# Altium PCB ArduinoUnoShield.PcbDoc
Units mm, origin at the board's own origin, x right, y up, seen from the top; angles counter-clockwise.
Board outline 68.58 x 53.34 mm, 2 copper layers (Top Layer, Bottom Layer); 17 components, 77 nets, 156 pads, 6 vias.
Unrouted connection lines stored in the file: 5.
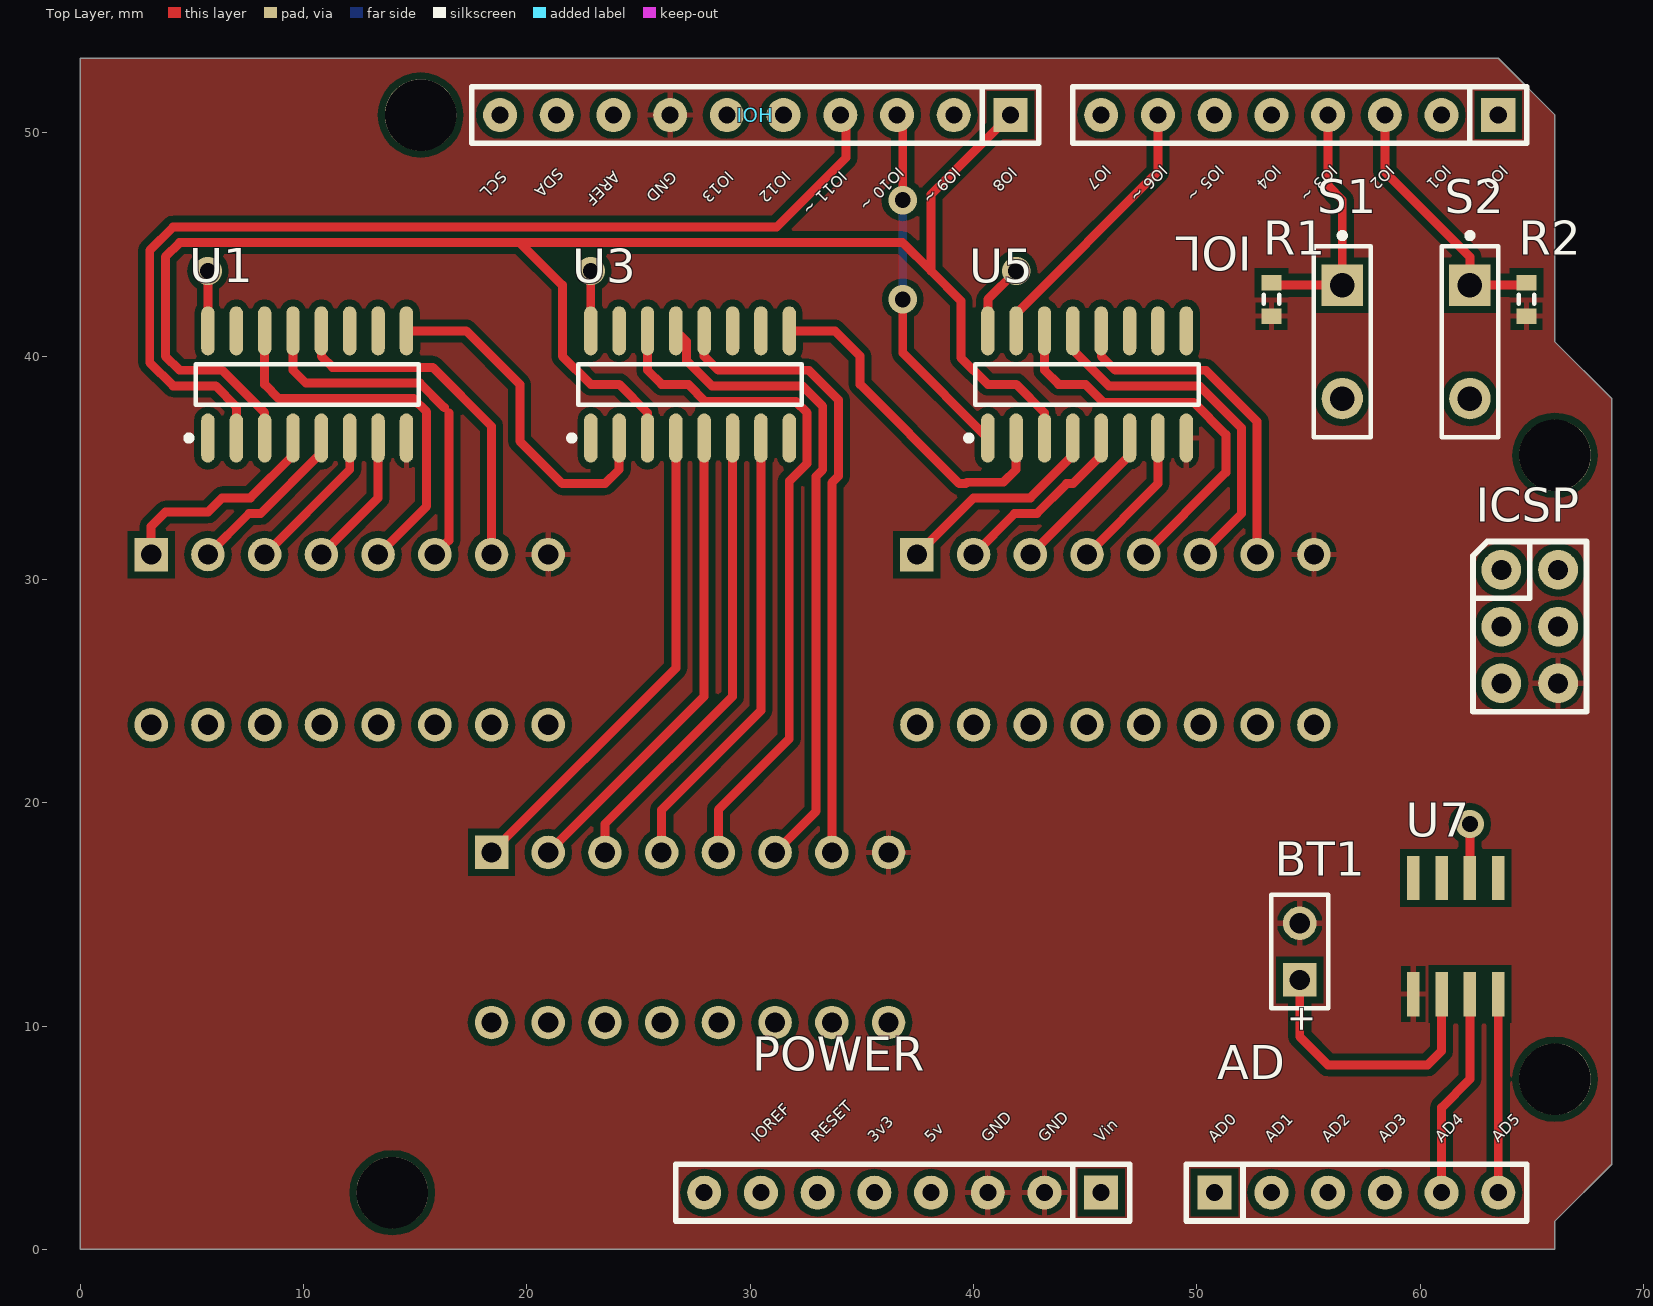
[diagram p0: Top Layer view]
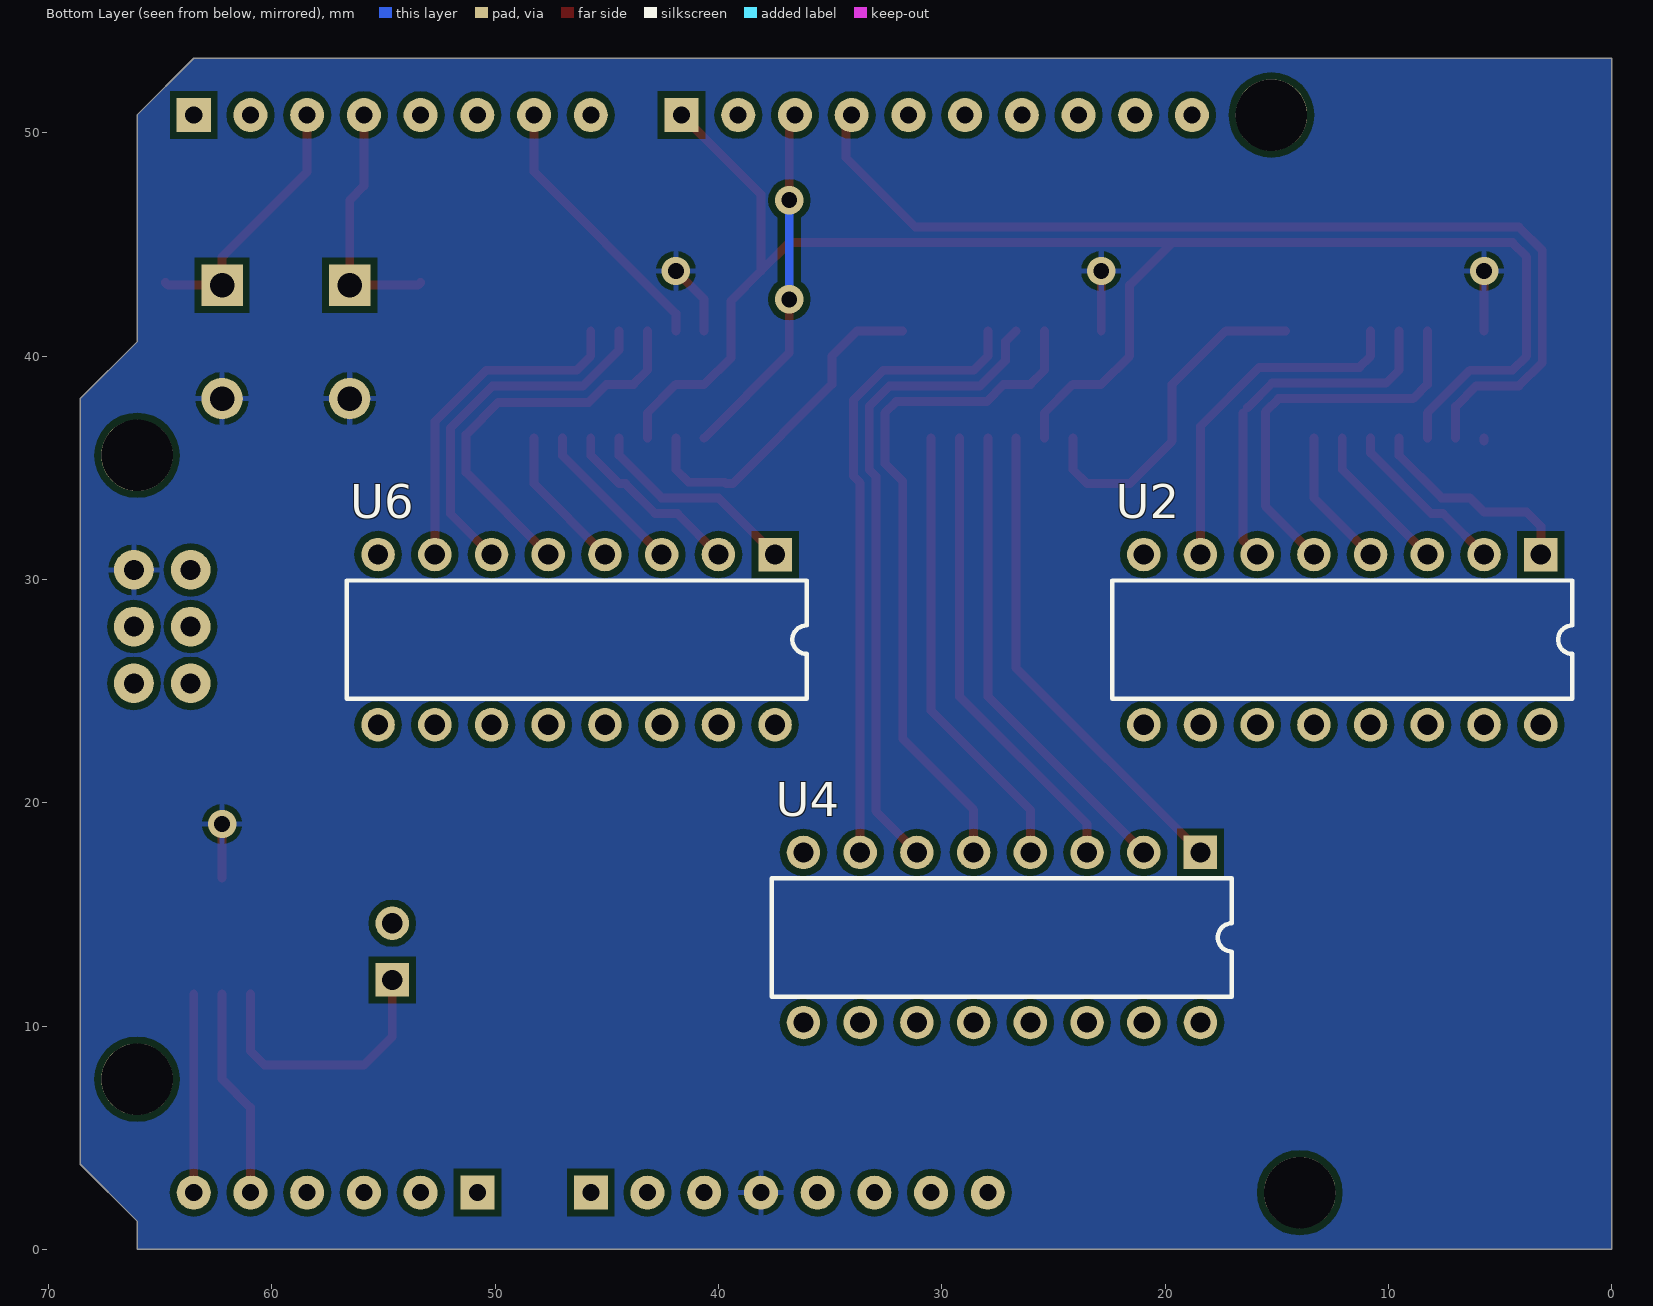
[diagram p1: Bottom Layer view, seen from below]

## Layer stack, top to bottom
Top Solder: solder mask 0.0102, Solder Resist, Dk 3.5
Top Layer: signal copper 0.0356
Dielectric1: dielectric 0.32, FR-4, Dk 4.8
Bottom Layer: signal copper 0.0356
Bottom Solder: solder mask 0.0102, Solder Resist, Dk 3.5

## Board outline
0,0 0,53.34 63.5,53.34 66.04,50.8 66.04,40.64 68.58,38.1 68.58,3.81 66.04,1.27 66.04,0

## Design rules (kind name [scope] priority, off if disabled: settings)
Clearance [All] p1: gap=0.3 ignorepadtopadclearanceinfootprint=FALSE
PolygonConnect [All] p1: connectstyle=Relief reliefconductorwidth=0.254 reliefentries=4 polygonreliefangle="90 Angle" airgapwidth=0.254
RoomDefinition Clock [InComponentClass('Clock')] p1: confinementstyle=ConfineIn formatcopy=TRUE lockcomponents=FALSE outline -29.845,58.42 20.955,58.42 20.955,83.82 -29.845,83.82
RoomDefinition ArduinoUnoShield [InComponentClass('ArduinoUnoShield')] p2: confinementstyle=ConfineOut formatcopy=TRUE lockcomponents=FALSE outline 69.723,-0.889 84.709,-0.889 84.709,10.922 69.723,10.922
RoutingVias [All] p1: holewidth=0.711 width=1.27 viastyle="Through Hole" minholewidth=0.711 minwidth=1.27 maxholewidth=0.711 maxwidth=1.27
SilkToSolderMaskClearance SilkscreenOverComponentPads [IsPad] p1: minsilkscreentomaskgap=0.254 clearancetoexposedcopper=TRUE
SolderMaskExpansion [All] p1: expansion=0.102
Width [All] p1: maxlimit=0.6 minlimit=0.2 preferedwidth=0.4
29 further rules are at their usual default settings.

## Classes and differential pairs
component class Clock: U1 U2 U3 U4 U5 U6
component class ArduinoUnoShield: AD BT1 ICSP IOH IOL POWER R1 R2 S1 S2 U7

## Components (designator, comment, footprint, x,y, rotation, side; value= is the part's Value field where it differs from the comment)
AD "AD" "Header 6x1 8.5mm" 50.8,2.54 r0 top locked
BT1 "Battery" BAT-2 54.61,13.335 r90 top
ICSP "ICSP" ICSP 63.64,30.43 r0 top locked
IOH "IOH" "Header 10x1 8.5mm" 41.656,50.8 r180 top locked
IOL "IOL" "Header 8x1 8.5mm" 63.5,50.8 r180 top locked
POWER "POWER_UNO" "Header 8x1 8.5mm" 45.72,2.54 r180 top locked
R1 "Res3" J1-0603 53.34,42.545 r90 top value=1K
R2 "Res3" J1-0603 64.77,42.545 r90 top value=1K
S1 "SW-PB" SPST-2 56.515,40.64 r270 top
S2 "SW-PB" SPST-2 62.23,40.64 r270 top
U1 "MC14094BD" 751B-05_N 10.16,38.735 r90 top
U2 "ULN2003A" DIP16 12.065,27.305 r0 bottom
U3 "MC14094BD" 751B-05_N 27.305,38.735 r90 top
U4 "ULN2003A" DIP16 27.305,13.97 r0 bottom
U5 "MC14094BD" 751B-05_N 45.085,38.735 r90 top
U6 "ULN2003A" DIP16 46.355,27.305 r0 bottom
U7 "DS3231MZ+" SOIC8_150MIL 61.595,14.03 r180 top

## Footprints (in the part's own frame and the unit in brackets; to place one, negate y for a bottom-side part, rotate by r counter-clockwise, add the part's x,y. Pads: shape width x height; smd on the part's side, far side on the other; paste and mask are expansions set on the pad)
751B-05_N [mm] "SOIC, 16-Leads, Body 9.9x3.9mm, Pitch 1.27mm, IPC Medium Density"
  oval 2.2x0.6 smd: 1(-2.4,4.445) 2(-2.4,3.175) 3(-2.4,1.905) 4(-2.4,0.635) 5(-2.4,-0.635) 6(-2.4,-1.905) 7(-2.4,-3.175) 8(-2.4,-4.445) 9(2.4,-4.445) 10(2.4,-3.175) 11(2.4,-1.905) 12(2.4,-0.635) 13(2.4,0.635) 14(2.4,1.905) 15(2.4,3.175) 16(2.4,4.445)
  silkscreen extent -2.52,-5 0.9,5.42, body extent -2,-5 2,5, height 1.75
BAT-2 [mm] "Battery; 2 Leads"
  rect 1.5x1.5 hole 0.9: 1(-1.27,0)
  round 1.5 hole 0.9: 2(1.27,0)
  silkscreen extent -2.54,-1.27 2.54,1.27
DIP16 [mm] "DIP; 16 Leads; Row Spacing 7.62 mm; Pitch 2.54 mm"
  rect 1.5x1.5 hole 0.9: 1(-8.89,-3.81)
  round 1.5 hole 0.9: 2(-6.35,-3.81) 3(-3.81,-3.81) 4(-1.27,-3.81) 5(1.27,-3.81) 6(3.81,-3.81) 7(6.35,-3.81) 8(8.89,-3.81) 9(8.89,3.81) 10(6.35,3.81) 11(3.81,3.81) 12(1.27,3.81) 13(-1.27,3.81) 14(-3.81,3.81) 15(-6.35,3.81) 16(-8.89,3.81)
  silkscreen extent -10.3,-2.65 10.3,2.65
"Header 6x1 8.5mm" [mil] "Stackable 6 pin header"
  rect 60x60 hole 30: 1(0,0)
  round 60 hole 30: 2(100,0) 3(200,0) 4(300,0) 5(400,0) 6(500,0)
  silkscreen extent -50,-50 550,50, body extent -50,-50 550,50, height 335
"Header 8x1 8.5mm" [mil] "Stackable 8 pin header"
  rect 60x60 hole 30: 1(0,0)
  round 60 hole 30: 2(100,0) 3(200,0) 4(300,0) 5(400,0) 6(500,0) 7(600,0) 8(700,0)
  silkscreen extent -50,-50 750,50, body extent -50,-50 750,50, height 335
"Header 10x1 8.5mm" [mil] "Stackable 10 pin header"
  rect 60x60 hole 30: 1(0,0)
  round 60 hole 30: 2(100,0) 3(200,0) 4(300,0) 5(400,0) 6(500,0) 7(600,0) 8(700,0) 9(800,0) 10(900,0)
  silkscreen extent -50,-50 950,50, body extent -50,-50 950,50, height 335
ICSP [mil]
  round 70 hole 35.43: 1(0,0) 2(100,0) 3(0,-100) 4(100,-100) 5(0,-200) 6(100,-200)
  silkscreen extent -50,-250 150,50, body extent -50,-250 150,50, height 485
J1-0603 [mm] "Chip Resistor, Body 1.6x0.8mm, IPC High Density"
  rect 0.7x0.9 smd: 1(-0.75,0) 2(0.75,0)
  silkscreen extent -0.2,-0.35 0.2,0.35, body extent -0.85,-0.48 0.85,0.48, height 0.9
SOIC8_150MIL [mil]
  rect 22x78 smd: 1(-75,-102.36) 2(-25,-102.36) 3(25,-102.36) 4(75,-102.36) 5(75,102.36) 6(25,102.36) 7(-25,102.36) 8(-75,102.36)
SPST-2 [mm] "Switch; 2 Leads"
  rect 1.85x1.85 hole 1.1: 1(-2.54,0)
  round 1.85 hole 1.1: 2(2.54,0)
  silkscreen extent -4.89,-1.27 4.28,1.27

## Part data
AD: Supplier Part Number 1=2699089, Supplier 1=Arrow, Supplier 2=Digi-Key, Supplier 3=Arrow, Supplier 4=Arrow, Supplier Part Number 2=SAM1198-06-ND, Supplier Part Number 3=2699088, Supplier Part Number 4=2699075
BT1: "Multicell Battery", LatestRevisionDate=17-Jul-2002, LatestRevisionNote="Re-released for DXP Platform.", PackageDescription="Battery; 2 Leads", PackageReference=BAT-2, Published=24-Mar-1999, Publisher="Altium Limited"
ICSP: Supplier Part Number 1=2699117, Supplier 1=Arrow, Supplier 2=Arrow, Supplier 3=Digi-Key, Supplier 4=Arrow, Supplier 5=Digi-Key, Supplier Part Number 2=2699116, Supplier Part Number 3=SAM1185-06-ND, Supplier Part Number 4=2699091, Supplier Part Number 5=SAM1196-06-ND
IOH: Supplier Part Number 1=2698803S4475693N1004, Supplier 1=Arrow, Supplier 2=Digi-Key, Supplier 3=Arrow, Supplier Part Number 2=SAM1198-10-ND, Supplier Part Number 3=2698789
IOL POWER: Supplier Part Number 1=SAM1198-08-ND, Supplier 1=Digi-Key, Supplier 2=Arrow, Supplier 3=Arrow, Supplier 4=Arrow, Supplier Part Number 2=2698939, Supplier Part Number 3=2698940, Supplier Part Number 4=2698925
R1 R2: "Resistor", LatestRevisionDate=29-May-2009, LatestRevisionNote="IPC-7351 Footprint Added.", PackageDescription="Chip Resistor", PackageReference=J1-0603, Published=8-Jun-2000, Publisher="Altium Limited"
S1 S2: "Switch", LatestRevisionDate=17-Jul-2002, LatestRevisionNote="Re-released for DXP Platform.", PackageDescription="Switch; 2 Leads", PackageReference=SPST-2, Published=24-Mar-1999, Publisher="Altium Limited"
U1 U3 U5: "8-Stage Shift/Store Register with 3-State Outputs", Code_IPC=SOIC127P600-16, Code_JEDEC=MS-012-AC, ComponentLink1Description="Manufacturer Link", ComponentLink1URL=http://www.onsemi.com/, ComponentLink2Description=Datasheet, ComponentLink2URL=http://www.onsemi.com/pub/Collateral/MC14094B-D.PDF, DatasheetVersion=1995, LatestRevisionDate=13-Apr-2006, LatestRevisionNote="IPC-7351 Footprint Added.", PackageDescription="16-Pin Small Outline Integrated Circuit 1.27 mm Pitch", PackageReference=751B-05, PackageVersion=Oct-1999, Published=15-Apr-2002, Publisher="Altium Limited"
U2 U4 U6: "Seven Darlington Array", ComponentLink1Description="Manufacturer Link", ComponentLink1URL=http://www.st.com/, ComponentLink2Description=Datasheet, ComponentLink2URL=http://www.st.com/stonline/products/literature/ds/5279/uln2001.pdf, DatasheetVersion=Sep-1998, LatestRevisionDate=06-Jun-2005, LatestRevisionNote="Stylized 3D Model Added.", PackageDescription="DIP; 16 Leads; Row Spacing 7.62 mm; Pitch 2.54 mm", PackageReference=DIP16, PackageVersion=Apr-1996, Published=8-Jun-2000, Publisher="Altium Limited"
U7: Package="SOIC-8 Maxim Integrated", Availability=Good, MF="Maxim Integrated", MP=DS3231MZ+, Price="5.38 USD"

## Free pads (board coordinates)
  round 3.2 hole 3.2: 0(13.97,2.54) 0(15.24,50.8) 0(66.04,7.62) 0(66.04,35.56)

## Via types
v1: diameter 1.27, hole 0.711, Top Layer to Bottom Layer, 6 vias

## Nets (pads, with @x,y where several pads share a name; then routed paths per layer and width w, separated by ;. In a path a pad name is that pad's centre, name@x,y a point inside that pad or via, vN(x,y) a via of type N, cw(c..) or ccw(c..) an arc to the next point about the centre after c; other vN are vias at no path point)
3V3: POWER.5
5V: ICSP.2 POWER.4 S1.2 S2.2 U1.16 U3.16 U5.16 U7.2 | length 11
  Top Layer w0.4: U1.16 v1(5.715,43.815) ; U3.16 v1(22.86,43.815) ; U5.16 40.64,42.545 v1(41.91,43.815) ; U7.2 v1(62.23,19.05)
AD0: AD.1
AD1: AD.2
AD2: AD.3
AD3: AD.4
AD4: AD.5 U7.7 | length 9.4
  Top Layer w0.4: AD.5 60.96,6.35 62.23,7.62 U7.7
AD5: AD.6 U7.8 | length 8.9
  Top Layer w0.4: AD.6 U7.8
AREF: IOH.8
GND: BT1.2 ICSP.6 IOH.7 POWER.2 POWER.3 R1.1 R2.1 U1.8 U2.8 U3.8 U4.8 U5.8 U6.8 U7.5
IO0: IOL.1
IO1: IOL.2
IO2: IOL.3 R2.2 S2.1 | length 11.8
  Top Layer w0.4: IOL.3 58.42,48.26 62.23,44.45 S2.1 64.655,43.18 R2.2
IO3: IOL.4 R1.2 S1.1 | length 11.1
  Top Layer w0.4: R1.2 53.455,43.18 S1.1 56.515,46.99 55.88,47.625 IOL.4
IO4: IOL.5
IO5: IOL.6
IO6: IOL.7 U1.15 U3.15 U5.15 | length 12.3
  Top Layer w0.4: U5.15 41.91,41.91 48.26,48.26 IOL.7
IO7: IOL.8
IO8: IOH.1 U1.3 U3.3 U5.3 | length 76.8
  Top Layer w0.4: U1.3 8.255,37.465 6.35,39.37 4.445,39.37 3.81,40.005 3.81,44.45 4.445,45.085 19.685,45.085 ; U3.3 25.4,37.465 24.13,38.735 22.86,38.735 21.59,40.005 21.59,43.18 19.685,45.085 ; IOH.1 38.1,47.244 38.1,43.815 ; U5.3 43.18,37.465 41.91,38.735 40.64,38.735 39.435,39.94 39.435,42.48 38.1,43.815 ; 19.685,45.085 36.83,45.085 38.1,43.815
IO9: IOH.2
IO10: IOH.3 U1.1 U3.1 U5.1 | length 16.3
  Top Layer w0.4: U1.1@5.715,36.195 U1.1 ; IOH.3 36.83,50.546 v1(36.83,46.99) ; v1(36.83,42.545) 36.83,40.145 U5.1
  Bottom Layer w0.4: v1(36.83,42.545) v1(36.83,46.99)
IO11: IOH.4 U1.2 | length 46
  Top Layer w0.4: U1.2 6.985,37.745 6.06,38.67 4.155,38.67 3.11,39.715 3.11,44.74 4.155,45.785 31.18,45.785 34.29,48.895 34.29,50.546 IOH.4
IO12: IOH.5
IO13: IOH.6
IOREF: POWER.7
MISO: ICSP.1
MOSI: ICSP.4
NetBT1_1: BT1.1 U7.6 | length 12.2
  Top Layer w0.4: BT1.1 54.61,9.525 55.88,8.255 60.325,8.255 60.96,8.89 U7.6
NetU1_4: U1.4 U2.1 | length 9.7
  Top Layer w0.4: U2.1 3.175,32.385 3.81,33.02 5.715,33.02 6.35,33.655 7.62,33.655 9.525,35.56 U1.4
NetU1_5: U1.5 U2.2 | length 7.6
  Top Layer w0.4: U2.2 7.555,32.955 8.076,32.955 10.795,35.674 U1.5
NetU1_6: U1.6 U2.3 | length 6.8
  Top Layer w0.4: U2.3 12.065,34.925 U1.6
NetU1_7: U1.7 U2.4 | length 6.3
  Top Layer w0.4: U2.4 13.335,33.655 U1.7
NetU1_9: U1.9 U3.2 | length 15.5
  Top Layer w0.4: U1.9 17.285,41.135 19.685,38.735 19.685,36.195 21.59,34.29 23.495,34.29 24.13,34.925 U3.2
NetU1_12: U1.12 U2.7 | length 15.8
  Top Layer w0.4: U1.12 10.795,40.005 11.3,39.5 15.776,39.5 18.415,36.861 U2.7
NetU1_13: U1.13 U2.6 | length 15.9
  Top Layer w0.4: U1.13 9.525,39.37 10.095,38.8 15.203,38.8 16.305,37.698 ; U2.6 16.51,31.75 16.51,37.465
NetU1_14: U1.14 U2.5 | length 17.4
  Top Layer w0.4: U1.14 8.255,38.735 8.89,38.1 14.913,38.1 15.505,37.508 15.505,33.285 U2.5
NetU2_10: U2.10
NetU2_11: U2.11
NetU2_12: U2.12
NetU2_13: U2.13
NetU2_14: U2.14
NetU2_15: U2.15
NetU2_16: U2.16
NetU3_4: U3.4 U4.1 | length 22
  Top Layer w0.4: U4.1 26.67,26.035 U3.4
NetU3_5: U3.5 U4.2 | length 21.4
  Top Layer w0.4: U4.2 27.94,24.765 U3.5
NetU3_6: U3.6 U4.3 | length 20.9
  Top Layer w0.4: U4.3 23.495,19.05 29.21,24.765 U3.6
NetU3_7: U3.7 U4.4 | length 20.4
  Top Layer w0.4: U4.4 26.035,19.685 30.48,24.13 U3.7
NetU3_9: U3.9 U5.2 | length 15.4
  Top Layer w0.4: U3.9 33.795,41.135 34.925,40.005 34.925,38.735 39.37,34.29 39.65,34.29 39.715,34.355 41.34,34.355 41.91,34.925 U5.2
NetU3_12: U3.12 U4.7 | length 28.3
  Top Layer w0.4: U3.12 27.94,40.005 28.575,39.37 32.626,39.37 33.95,38.046 33.95,34.624 33.655,34.329 U4.7
NetU3_13: U3.13 U4.6 | length 29.3
  Top Layer w0.4: U3.13 27.14,40.665 27.14,39.815 28.285,38.67 32.336,38.67 33.25,37.756 33.25,34.914 32.955,34.619 32.955,19.62 U4.6
NetU3_14: U3.14 U4.5 | length 31
  Top Layer w0.4: U3.14 25.4,39.37 26.035,38.735 27.23,38.735 27.995,37.97 32.046,37.97 32.55,37.466 32.55,35.204 31.75,34.404 31.75,22.86 28.575,19.685 U4.5
NetU4_10: U4.10
NetU4_11: U4.11
NetU4_12: U4.12
NetU4_13: U4.13
NetU4_14: U4.14
NetU4_15: U4.15
NetU4_16: U4.16
NetU5_4: U5.4 U6.1 | length 9.6
  Top Layer w0.4: U6.1 40.005,33.655 42.545,33.655 44.45,35.56 U5.4
NetU5_5: U5.5 U6.2 | length 8.3
  Top Layer w0.4: U6.2 41.845,32.955 42.835,32.955 44.17,34.29 44.45,34.29 45.72,35.56 U5.5
NetU5_6: U5.6 U6.3 | length 7.1
  Top Layer w0.4: U6.3 46.99,35.56 U5.6
NetU5_7: U5.7 U6.4 | length 6.5
  Top Layer w0.4: U6.4 48.26,34.29 U5.7
NetU5_12: U5.12 U6.7 | length 15.3
  Top Layer w0.4: U5.12 45.72,40.005 46.355,39.37 50.406,39.37 52.705,37.071 U6.7
NetU5_13: U5.13 U6.6 | length 16.3
  Top Layer w0.4: U5.13 44.45,40.285 46.065,38.67 50.116,38.67 52.005,36.781 52.005,32.955 U6.6
NetU5_14: U5.14 U6.5 | length 18
  Top Layer w0.4: U5.14 43.18,39.37 43.815,38.735 45.01,38.735 45.81,37.935 49.861,37.935 51.305,36.491 51.305,34.795 U6.5
NetU6_10: U6.10
NetU6_11: U6.11
NetU6_12: U6.12
NetU6_13: U6.13
NetU6_14: U6.14
NetU6_15: U6.15
NetU6_16: U6.16
RESET: ICSP.5 POWER.6
SCK: ICSP.3
SCL: IOH.10
SDA: IOH.9
VIN: POWER.1
pads on no net: POWER.8 U1.10 U1.11 U2.9 U3.10 U3.11 U4.9 U5.9 U5.10 U5.11 U6.9 U7.1 U7.3 U7.4

## Polygon pours and split planes (outlines as drawn)
GND on Top Layer "GND_L01_P000" (solid, pour order 0): 0,0 0,53.34 63.5,53.34 66.04,50.8 66.04,40.64 68.58,38.1 68.58,3.81 66.04,1.27 66.04,0
5V on Bottom Layer "5V_L02_P001" (solid, pour order 1): 0,0 0,53.34 63.5,53.34 66.04,50.8 66.04,40.64 68.58,38.1 68.58,3.81 66.04,1.27 66.04,0

## Silkscreen, mask and mechanical layers (free items; w line width, h text height)
Top Overlay:
  text "IO7" at 45.847,48.588 h0.51 r225
  text "IO6 ~" at 48.387,48.588 h0.51 r225
  text "IO5 ~" at 50.927,48.588 h0.51 r225
  text "IO4" at 53.467,48.588 h0.51 r225
  text "IO3 ~" at 56.007,48.588 h0.51 r225
  text "IO2" at 58.547,48.588 h0.51 r225
  text "IO1" at 61.087,48.588 h0.51 r225
  text "IO0" at 63.627,48.588 h0.51 r225
  text "IO10 ~" at 36.576,48.514 h0.51 r225
  text "IO9 ~" at 39.116,48.514 h0.51 r225
  text "IO8" at 41.656,48.514 h0.51 r225
  text "SDA" at 21.336,48.461 h0.51 r225
  text "SCL" at 18.796,48.334 h0.51 r225
  text "AREF" at 23.876,48.334 h0.51 r225
  text "GND" at 26.416,48.334 h0.51 r225
  text "IO13" at 28.956,48.334 h0.51 r225
  text "IO12" at 31.496,48.334 h0.51 r225
  text "IO11 ~" at 34.036,48.334 h0.51 r225
  text "IOREF" at 30.353,4.752 h0.51 r45
  text "RESET" at 33.02,4.752 h0.51 r45
  text "3v3" at 35.56,4.752 h0.51 r45
  text "5v" at 38.1,4.752 h0.51 r45
  text "GND" at 40.64,4.752 h0.51 r45
  text "GND" at 43.18,4.752 h0.51 r45
  text "Vin" at 45.72,4.752 h0.51 r45
  text "AD0" at 50.8,4.752 h0.51 r45
  text "AD1" at 53.34,4.752 h0.51 r45
  text "AD2" at 55.88,4.752 h0.51 r45
  text "AD3" at 58.42,4.752 h0.51 r45
  text "AD4" at 60.96,4.752 h0.51 r45
  text "AD5" at 63.5,4.752 h0.51 r45
  text "RESET" at 32.893,-63.881 h0.51 r45
  text "3v3" at 35.433,-63.881 h0.51 r45
  text "5v" at 37.973,-63.881 h0.51 r45
  text "GND" at 40.513,-63.881 h0.51 r45
  text "GND" at 43.053,-63.881 h0.51 r45
  text "Vin" at 45.593,-63.881 h0.51 r45
Mechanical 1:
  circle w0.127: c66.04,35.56 r1.6
  circle w0.127: c13.97,2.54 r1.6
  circle w0.127: c66.04,7.62 r1.6
  circle w0.127: c15.24,50.8 r1.6
  lines w0.127: 0,0 66.04,0 66.04,1.27 68.58,3.81 68.58,38.1 66.04,40.64 66.04,50.8 63.5,53.34 0,53.34 0,0

## Text inside footprints (layer, text, board x,y; h text height)
BT1: Top Overlay "+" at 55.187,9.665 h1.15 r90